# Altium PCB tPad_Yeongmi.PcbDoc (part 2 of 2)
Units mm, origin at the board's own origin, x right, y up, seen from the top; angles counter-clockwise.
Board outline 153.92 x 137.16 mm, 2 copper layers (Top Layer, Bottom Layer); 136 components, 117 nets, 499 pads, 114 vias.
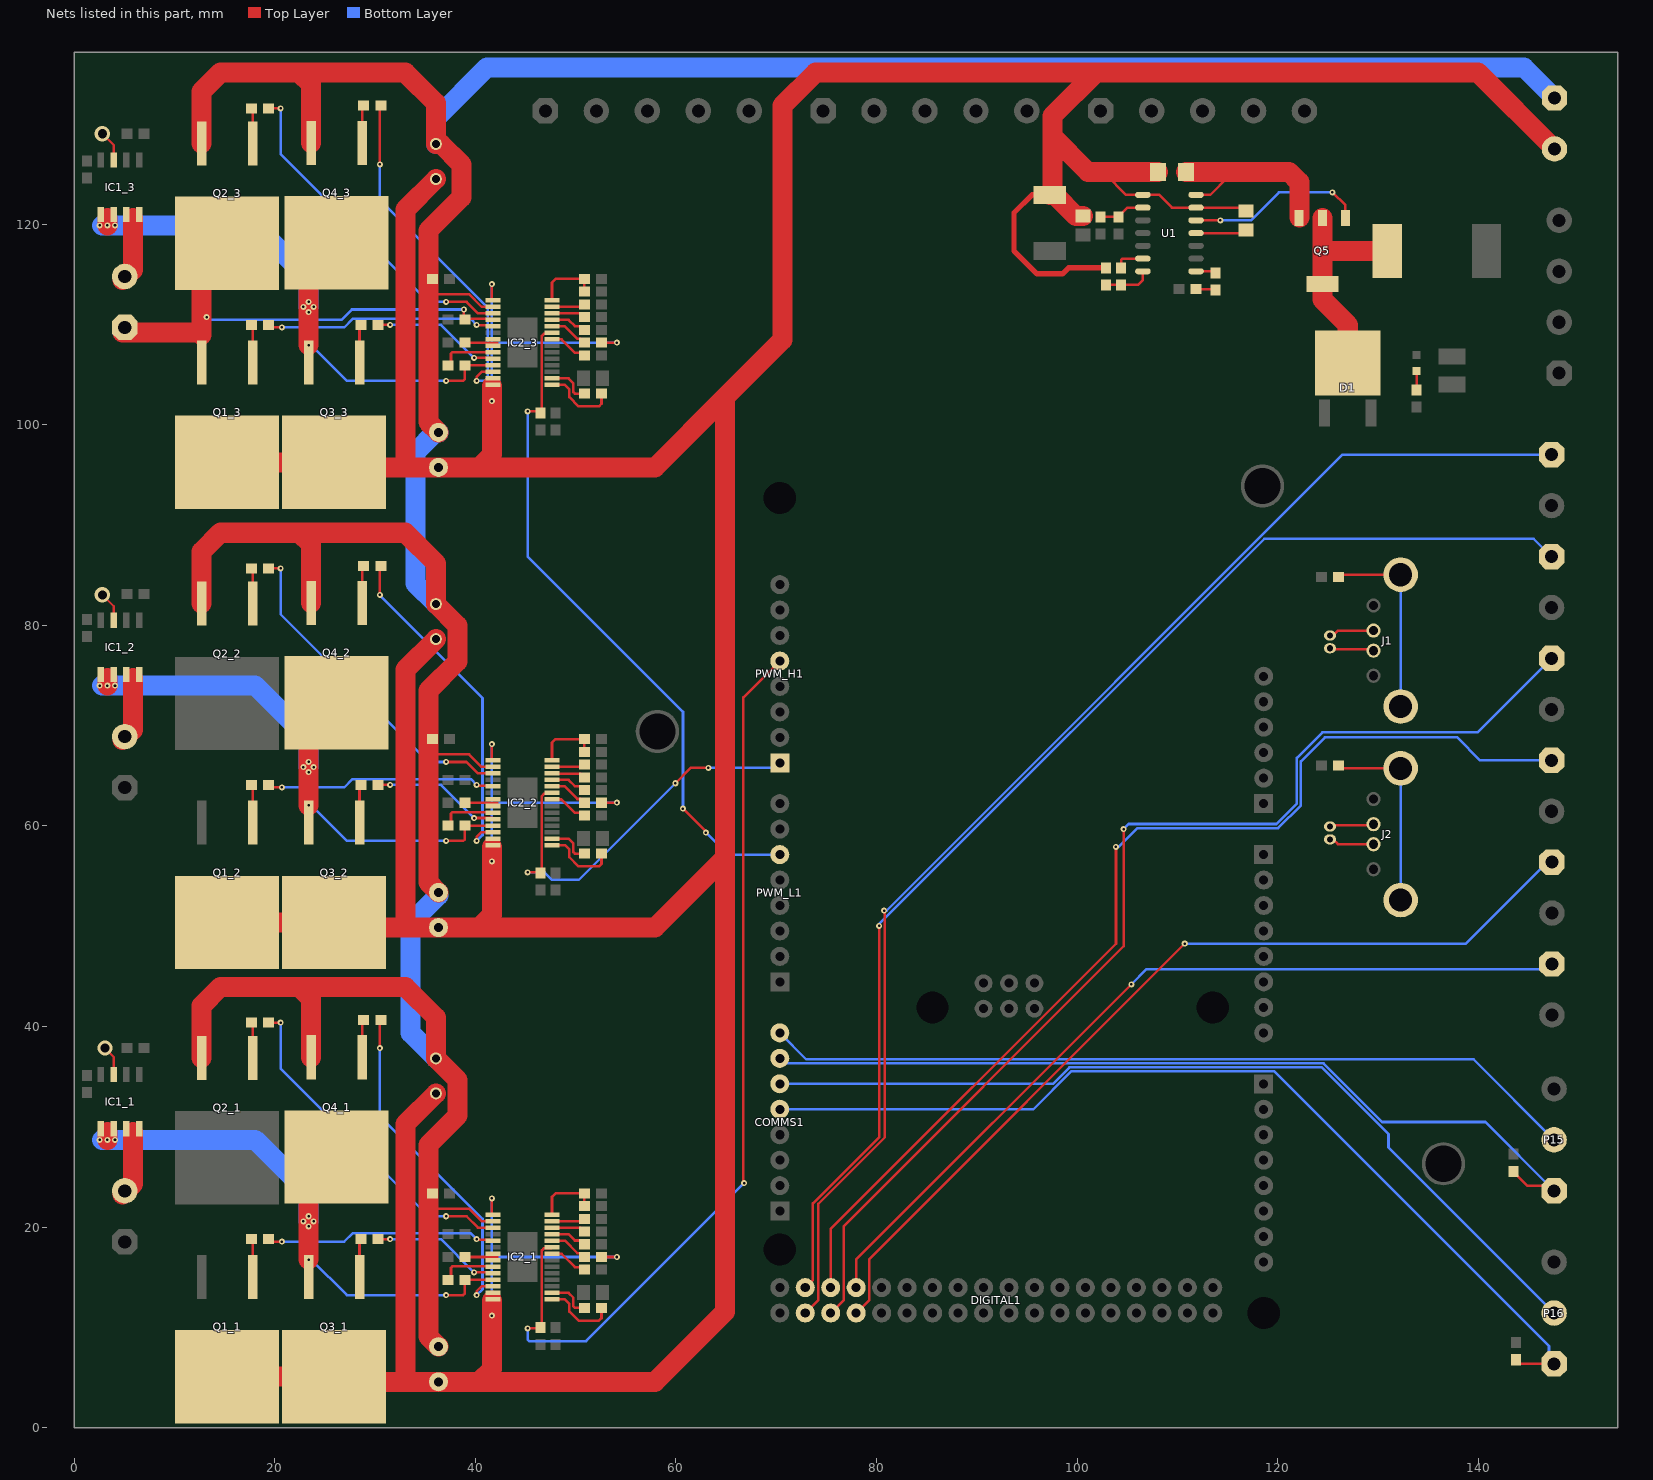
[diagram p2: the nets of this part, all layers, seen from the top]

## Via types
v1: diameter 0.6, hole 0.25, Top Layer to Bottom Layer, tented both sides, 111 vias
v2: diameter 1.5, hole 0.9, Top Layer to Bottom Layer, 3 vias

## Nets (pads, with @x,y where several pads share a name; then routed paths per layer and width w, separated by ;. In a path a pad name is that pad's centre, name@x,y a point inside that pad or via, vN(x,y) a via of type N, cw(c..) or ccw(c..) an arc to the next point about the centre after c; other vN are vias at no path point) (continued)
NetC3_3_2: C3_3.2 IC2_3.4 P1_3.1 Q1_3.3 Q2_3.2 | length 48.3
  Top Layer w0.254: Q2_3.2@12.7,115.57 Q2_3.2@15.24,118.11 ; v1(38.862,111.506) 38.862,110.578 C3_3.2@38.95,110.49 39.021,110.561 41.684,110.561 IC2_3.4@41.766,110.479
  Top Layer w2: P1_3.1@4.826,109.22 12.446,109.22 12.7,108.966 12.7,110.744 Q2_3.2@12.7,115.57
  Bottom Layer w0.254: v1(13.208,110.744) 13.471,110.481 26.661,110.481 27.686,111.506 v1(38.862,111.506)
NetC4_1_1: C4_1.1 IC2_1.7 IC2_1.8 | length 3.2
  Top Layer w0.254: C4_1.1@38.95,17.018 42.164,17.018
NetC4_2_1: C4_2.1 IC2_2.7 IC2_2.8 | length 3.2
  Top Layer w0.254: C4_2.1@38.95,62.318 42.164,62.318
NetC4_3_1: C4_3.1 IC2_3.7 IC2_3.8 | length 3.2
  Top Layer w0.254: C4_3.1@38.95,108.204 42.164,108.204
NetC6_1_1: C6_1.1 IC2_1.9 | length 5.6
  Top Layer w0.254: C6_1.1@37.25,14.732 37.572,15.054 37.572,15.925 37.721,16.073 41.736,16.073 IC2_1.9@41.766,16.043
NetC6_1_2: C6_1.2 IC1_1.1 IC1_1.2 IC2_1.11 Q3_1.3 Q4_1.2 | length 59
  Top Layer w0.254: v1(37.084,13.208) 38.784,13.208 38.95,13.374 C6_1.2@38.95,14.732 38.961,14.743 IC2_1.11@41.766,14.743
  Top Layer w2: v1(3.302,28.702) 3.302,29.464 ; v1(23.368,16.764) 23.368,17.526 v1(23.368,20.066) v1(23.368,21.082) 23.368,24.19 Q4_1.2@26.162,26.984
  Bottom Layer w0.254: v1(23.368,16.764) 23.39,16.786 23.6,16.786 27.178,13.208 v1(37.084,13.208)
  Bottom Layer w2: v1@2.794,28.702 v1(3.302,28.702) v1(4.064,28.702) 18.034,28.702 23.368,23.368 v1(23.368,21.082) 23.368,20.574
  other v1: 22.86,20.574 23.876,20.574 2.54,28.702
NetC6_2_1: C6_2.1 IC2_2.9 | length 5.6
  Top Layer w0.254: C6_2.1@37.25,60.032 37.572,60.354 37.572,61.225 37.721,61.373 41.736,61.373 IC2_2.9@41.766,61.343
NetC6_2_2: C6_2.2 IC1_2.1 IC1_2.2 IC2_2.11 Q3_2.3 Q4_2.2 | length 59
  Top Layer w0.254: v1(37.084,58.508) 38.784,58.508 38.95,58.674 C6_2.2@38.95,60.032 38.961,60.043 IC2_2.11@41.766,60.043
  Top Layer w2: v1(3.302,74.002) 3.302,74.764 ; v1(23.368,62.064) 23.368,62.826 v1(23.368,65.366) v1(23.368,66.382) 23.368,69.49 Q4_2.2@26.162,72.284
  Bottom Layer w0.254: v1(23.368,62.064) 23.39,62.086 23.6,62.086 27.178,58.508 v1(37.084,58.508)
  Bottom Layer w2: v1@2.794,74.002 v1(3.302,74.002) v1(4.064,74.002) 18.034,74.002 23.368,68.668 v1(23.368,66.382) 23.368,65.874
  other v1: 22.86,65.874 23.876,65.874 2.54,74.002
NetC6_3_1: C6_3.1 IC2_3.9 | length 5.6
  Top Layer w0.254: C6_3.1@37.25,105.918 37.572,106.24 37.572,107.111 37.721,107.259 41.736,107.259 IC2_3.9@41.766,107.229
NetC6_3_2: C6_3.2 IC1_3.1 IC1_3.2 IC2_3.11 Q3_3.3 Q4_3.2 | length 59
  Top Layer w0.254: v1(37.084,104.394) 38.784,104.394 38.95,104.56 C6_3.2@38.95,105.918 38.961,105.929 IC2_3.11@41.766,105.929
  Top Layer w2: v1(3.302,119.888) 3.302,120.65 ; v1(23.368,107.95) 23.368,108.712 v1(23.368,111.252) v1(23.368,112.268) 23.368,115.376 Q4_3.2@26.162,118.17
  Bottom Layer w0.254: v1(23.368,107.95) 23.39,107.972 23.6,107.972 27.178,104.394 v1(37.084,104.394)
  Bottom Layer w2: v1@2.794,119.888 v1(3.302,119.888) v1(4.064,119.888) 18.034,119.888 23.368,114.554 v1(23.368,112.268) 23.368,111.76
  other v1: 22.86,111.76 23.876,111.76 2.54,119.888
NetC7_1_1: C7_1.1 IC2_1.16 | length 4.4
  Top Layer w0.254: IC2_1.16@47.642,13.443 49.295,13.443 49.784,12.954 49.784,12.087 49.933,11.938 C7_1.1@50.878,11.938
NetC7_1_2: C7_1.2 IC2_1.15 | length 7.4
  Top Layer w0.254: IC2_1.15@47.642,12.793 48.929,12.793 49.378,12.344 49.378,11.582 50.292,10.668 52.324,10.668 52.578,10.922 C7_1.2@52.578,11.938
NetC7_2_1: C7_2.1 IC2_2.16 | length 4.4
  Top Layer w0.254: IC2_2.16@47.642,58.743 49.295,58.743 49.784,58.254 49.784,57.387 49.933,57.238 C7_2.1@50.878,57.238
NetC7_2_2: C7_2.2 IC2_2.15 | length 7.4
  Top Layer w0.254: IC2_2.15@47.642,58.093 48.929,58.093 49.378,57.644 49.378,56.882 50.292,55.968 52.324,55.968 52.578,56.222 C7_2.2@52.578,57.238
NetC7_3_1: C7_3.1 IC2_3.16 | length 4.4
  Top Layer w0.254: IC2_3.16@47.642,104.629 49.295,104.629 49.784,104.14 49.784,103.273 49.933,103.124 C7_3.1@50.878,103.124
NetC7_3_2: C7_3.2 IC2_3.15 | length 7.4
  Top Layer w0.254: IC2_3.15@47.642,103.979 48.929,103.979 49.378,103.53 49.378,102.768 50.292,101.854 52.324,101.854 52.578,102.108 C7_3.2@52.578,103.124
NetC10_1: C10.1 U1.11 | length 5.1
  Top Layer w0.254: U1.11@111.87,119.126 116.52,119.126 C10.1@116.84,119.446
NetC11_1: C11.1 U1.8 | length 2
  Top Layer w0.254: U1.8@111.87,115.316 113.626,115.316 C11.1@113.792,115.15
NetC11_2: C11.2 R23.1 | length 2
  Top Layer w0.254: R23.1@111.848,113.538 113.704,113.538 C11.2@113.792,113.45
NetD1_3: D1.3 L1.1 Q5.2 Q5.4 | length 22
  Top Layer w2: Q5.2@124.46,120.648 124.46,117.348 ; D1.3@127,106.172 127,109.982 124.46,112.522 Q5.4@124.46,114.048 124.46,117.348 ; L1.1@130.94,117.348 124.46,117.348
NetD2_2: D2.2 R18.2 | length 1.9
  Top Layer w0.254: R18.2@133.858,103.466 D2.2@133.858,105.372
NetIC1_1_3: IC1_1.3 IC1_1.4 P1_1.2 | length 6.6
  Top Layer w2: P1_1.2@4.826,23.26 5.842,24.276 5.842,29.464
NetIC1_1_7: IC1_1.7 | length 3
  Top Layer w0.254: v2(3.048,37.846) 3.937,36.957 IC1_1.7@3.937,35.224
NetIC1_2_3: IC1_2.3 IC1_2.4 P1_2.2 | length 6.6
  Top Layer w2: P1_2.2@4.826,68.56 5.842,69.576 5.842,74.764
NetIC1_2_7: IC1_2.7 | length 3
  Top Layer w0.254: v2(2.794,83.058) 3.937,81.915 IC1_2.7@3.937,80.524
NetIC1_3_3: IC1_3.3 IC1_3.4 P1_3.2 | length 6.6
  Top Layer w2: P1_3.2@4.826,114.446 5.842,115.462 5.842,120.65
NetIC1_3_7: IC1_3.7 | length 3.1
  Top Layer w0.254: v2(2.794,129.032) 3.937,127.889 IC1_3.7@3.937,126.41
NetIC2_1_3: IC2_1.3 R2_1.2 | length 33.5
  Top Layer w0.254: R2_1.2@19.392,40.386 v1(20.574,40.386) ; v1(37.084,21.082) 39.116,21.082 40.255,19.943 IC2_1.3@41.766,19.943
  Bottom Layer w0.254: v1(20.574,40.386) 20.574,35.814 35.306,21.082 v1(37.084,21.082)
NetIC2_1_5: IC2_1.5 R1_1.2 | length 23.1
  Top Layer w0.254: R1_1.2@19.392,18.796 19.646,18.542 v1(20.701,18.542) ; v1(40.132,18.796) 40.198,18.73 41.679,18.73 IC2_1.5@41.766,18.643
  Bottom Layer w0.254: v1(20.701,18.542) 26.924,18.542 27.757,19.375 39.553,19.375 v1(40.132,18.796)
NetIC2_1_10: IC2_1.10 R9_1.2 | length 12.9
  Top Layer w0.254: R9_1.2@30.314,18.796 v1(31.496,18.796) ; v1(39.878,15.494) 41.665,15.494 IC2_1.10@41.766,15.393
  Bottom Layer w0.254: v1(31.496,18.796) 36.576,18.796 v1(39.878,15.494)
NetIC2_1_12: IC2_1.12 R12_1.2 | length 34.2
  Top Layer w0.254: v1(30.48,37.846) 30.48,40.552 R12_1.2@30.568,40.64 ; v1(40.132,13.208) 40.132,13.601 40.624,14.093 IC2_1.12@41.766,14.093
  Bottom Layer w0.254: v1(30.48,37.846) 30.48,31.045 40.711,20.814 40.711,13.787 v1(40.132,13.208)
NetIC2_1_22: IC2_1.22 R11_1.1 | length 3.9
  Top Layer w0.254: IC2_1.22@47.642,17.343 48.592,17.343 49.933,16.002 50.624,16.002 R11_1.1@50.878,15.748
NetIC2_1_24: IC2_1.24 R10_1.1 | length 3.9
  Top Layer w0.254: IC2_1.24@47.642,18.643 48.921,18.643 50.173,17.391 50.505,17.391 R10_1.1@50.878,17.018
NetIC2_1_25: IC2_1.25 R8_1.1 | length 3.7
  Top Layer w0.254: IC2_1.25@47.642,19.293 49.287,19.293 49.919,18.661 50.505,18.661 R8_1.1@50.878,18.288
NetIC2_1_26: IC2_1.26 R7_1.1 | length 3.4
  Top Layer w0.254: IC2_1.26@47.642,19.943 47.654,19.931 50.505,19.931 R7_1.1@50.878,19.558
NetIC2_1_27: IC2_1.27 R5_1.1 | length 3.3
  Top Layer w0.254: IC2_1.27@47.642,20.593 50.643,20.593 R5_1.1@50.878,20.828
NetIC2_1_28: IC2_1.28 R3_1.2 R4_1.1 | length 6.4
  Top Layer w0.254: IC2_1.28@47.642,21.243 47.642,23.004 48.006,23.368 R3_1.2@50.878,23.368 R4_1.1@50.878,22.098
NetIC2_2_3: IC2_2.3 R2_2.2 | length 33.5
  Top Layer w0.254: R2_2.2@19.392,85.686 v1(20.574,85.686) ; v1(37.084,66.382) 39.116,66.382 40.255,65.243 IC2_2.3@41.766,65.243
  Bottom Layer w0.254: v1(20.574,85.686) 20.574,81.114 35.306,66.382 v1(37.084,66.382)
NetIC2_2_5: IC2_2.5 R1_2.2 | length 23.1
  Top Layer w0.254: R1_2.2@19.392,64.096 19.646,63.842 v1(20.701,63.842) ; v1(40.132,64.096) 40.198,64.03 41.679,64.03 IC2_2.5@41.766,63.943
  Bottom Layer w0.254: v1(20.701,63.842) 26.924,63.842 27.757,64.675 39.553,64.675 v1(40.132,64.096)
NetIC2_2_10: IC2_2.10 R9_2.2 | length 12.9
  Top Layer w0.254: R9_2.2@30.314,64.096 v1(31.496,64.096) ; v1(39.878,60.794) 41.665,60.794 IC2_2.10@41.766,60.693
  Bottom Layer w0.254: v1(31.496,64.096) 36.576,64.096 v1(39.878,60.794)
NetIC2_2_12: IC2_2.12 R12_2.2 | length 34.2
  Top Layer w0.254: v1(30.48,83.058) 30.48,85.852 R12_2.2@30.568,85.94 ; v1(40.132,58.508) 40.132,58.901 40.624,59.393 IC2_2.12@41.766,59.393
  Bottom Layer w0.254: v1(30.48,83.058) 30.48,82.974 40.711,72.743 40.711,59.087 v1(40.132,58.508)
NetIC2_2_22: IC2_2.22 R11_2.1 | length 3.9
  Top Layer w0.254: IC2_2.22@47.642,62.643 48.592,62.643 49.933,61.302 50.624,61.302 R11_2.1@50.878,61.048
NetIC2_2_24: IC2_2.24 R10_2.1 | length 3.9
  Top Layer w0.254: IC2_2.24@47.642,63.943 48.921,63.943 50.173,62.691 50.505,62.691 R10_2.1@50.878,62.318
NetIC2_2_25: IC2_2.25 R8_2.1 | length 3.7
  Top Layer w0.254: IC2_2.25@47.642,64.593 49.287,64.593 49.919,63.961 50.505,63.961 R8_2.1@50.878,63.588
NetIC2_2_26: IC2_2.26 R7_2.1 | length 3.4
  Top Layer w0.254: IC2_2.26@47.642,65.243 47.654,65.231 50.505,65.231 R7_2.1@50.878,64.858
NetIC2_2_27: IC2_2.27 R5_2.1 | length 3.3
  Top Layer w0.254: IC2_2.27@47.642,65.893 50.643,65.893 R5_2.1@50.878,66.128
NetIC2_2_28: IC2_2.28 R3_2.2 R4_2.1 | length 6.4
  Top Layer w0.254: IC2_2.28@47.642,66.543 47.642,68.304 48.006,68.668 R3_2.2@50.878,68.668 R4_2.1@50.878,67.398
NetIC2_3_3: IC2_3.3 R2_3.2 | length 33.5
  Top Layer w0.254: R2_3.2@19.392,131.572 v1(20.574,131.572) ; v1(37.084,112.268) 39.116,112.268 40.255,111.129 IC2_3.3@41.766,111.129
  Bottom Layer w0.254: v1(20.574,131.572) 20.574,127 35.306,112.268 v1(37.084,112.268)
NetIC2_3_5: IC2_3.5 R1_3.2 | length 23.1
  Top Layer w0.254: R1_3.2@19.392,109.982 19.646,109.728 v1(20.701,109.728) ; v1(40.132,109.982) 40.198,109.916 41.679,109.916 IC2_3.5@41.766,109.829
  Bottom Layer w0.254: v1(20.701,109.728) 26.924,109.728 27.757,110.561 39.553,110.561 v1(40.132,109.982)
NetIC2_3_10: IC2_3.10 R9_3.2 | length 12.9
  Top Layer w0.254: R9_3.2@30.314,109.982 v1(31.496,109.982) ; v1(39.878,106.68) 41.665,106.68 IC2_3.10@41.766,106.579
  Bottom Layer w0.254: v1(31.496,109.982) 36.576,109.982 v1(39.878,106.68)
NetIC2_3_12: IC2_3.12 R12_3.2 | length 35.1
  Top Layer w0.254: v1(30.48,125.984) 30.48,131.738 R12_3.2@30.568,131.826 ; v1(40.132,104.394) 40.132,104.787 40.624,105.279 IC2_3.12@41.766,105.279
  Bottom Layer w0.254: v1(30.48,125.984) 30.48,122.428 41.25,111.658 41.25,104.75 40.894,104.394 v1(40.132,104.394)
NetIC2_3_22: IC2_3.22 R11_3.1 | length 3.9
  Top Layer w0.254: IC2_3.22@47.642,108.529 48.592,108.529 49.933,107.188 50.624,107.188 R11_3.1@50.878,106.934
NetIC2_3_24: IC2_3.24 R10_3.1 | length 3.9
  Top Layer w0.254: IC2_3.24@47.642,109.829 48.921,109.829 50.173,108.577 50.505,108.577 R10_3.1@50.878,108.204
NetIC2_3_25: IC2_3.25 R8_3.1 | length 3.7
  Top Layer w0.254: IC2_3.25@47.642,110.479 49.287,110.479 49.919,109.847 50.505,109.847 R8_3.1@50.878,109.474
NetIC2_3_26: IC2_3.26 R7_3.1 | length 3.4
  Top Layer w0.254: IC2_3.26@47.642,111.129 47.654,111.117 50.505,111.117 R7_3.1@50.878,110.744
NetIC2_3_27: IC2_3.27 R5_3.1 | length 3.3
  Top Layer w0.254: IC2_3.27@47.642,111.779 50.643,111.779 R5_3.1@50.878,112.014
NetIC2_3_28: IC2_3.28 R3_3.2 R4_3.1 | length 6.4
  Top Layer w0.254: IC2_3.28@47.642,112.429 47.642,114.19 48.006,114.554 R3_3.2@50.878,114.554 R4_3.1@50.878,113.284
NetJ1_2: J1.2 P3.2 | length 4.4
  Top Layer w0.254: P3.2@125.222,77.724 125.341,77.605 129.445,77.605 J1.2@129.564,77.486
NetJ1_3: J1.3 P3.1 | length 4.5
  Top Layer w0.254: P3.1@125.222,78.994 125.524,78.994 126.016,79.486 J1.3@129.564,79.486
NetJ1_Shell: J1.Shell R16.2 | length 19.4
  Top Layer w0.254: R16.2@126.072,84.836 126.292,85.056 J1.Shell@132.274,85.056
  Bottom Layer w0.254: J1.Shell@132.274,71.916 J1.Shell@132.274,85.056
NetJ2_2: J2.2 P4.2 | length 4.5
  Top Layer w0.254: P4.2@125.222,58.674 125.524,58.674 126.016,58.182 J2.2@129.564,58.182
NetJ2_3: J2.3 P4.1 | length 4.4
  Top Layer w0.254: P4.1@125.222,59.944 125.341,60.063 129.445,60.063 J2.3@129.564,60.182
NetJ2_Shell: J2.Shell R17.2 | length 19.5
  Top Layer w0.254: R17.2@126.072,66.04 126.36,65.752 J2.Shell@132.274,65.752
  Bottom Layer w0.254: J2.Shell@132.274,52.612 J2.Shell@132.274,65.752
NetQ1_1_1: Q1_1.1 R1_1.1 | length 3.8
  Top Layer w0.254: R1_1.1@17.692,18.796 17.78,18.708 Q1_1.1@17.78,15.03
NetQ1_2_1: Q1_2.1 R1_2.1 | length 3.8
  Top Layer w0.254: R1_2.1@17.692,64.096 17.78,64.008 Q1_2.1@17.78,60.33
NetQ1_3_1: Q1_3.1 R1_3.1 | length 3.8
  Top Layer w0.254: R1_3.1@17.692,109.982 17.78,109.894 Q1_3.1@17.78,106.216
NetQ2_1_1: Q2_1.1 R2_1.1 | length 3.5
  Top Layer w0.254: R2_1.1@17.692,40.386 17.78,40.298 Q2_1.1@17.78,36.874
NetQ2_2_1: Q2_2.1 R2_2.1 | length 3.5
  Top Layer w0.254: R2_2.1@17.692,85.686 17.78,85.598 Q2_2.1@17.78,82.174
NetQ2_3_1: Q2_3.1 R2_3.1 | length 3.5
  Top Layer w0.254: R2_3.1@17.692,131.572 17.78,131.484 Q2_3.1@17.78,128.06
NetQ3_1_1: Q3_1.1 R9_1.1 | length 3.8
  Top Layer w0.254: Q3_1.1@28.448,15.03 28.448,18.63 R9_1.1@28.614,18.796
NetQ3_2_1: Q3_2.1 R9_2.1 | length 3.8
  Top Layer w0.254: Q3_2.1@28.448,60.33 28.448,63.93 R9_2.1@28.614,64.096
NetQ3_3_1: Q3_3.1 R9_3.1 | length 3.8
  Top Layer w0.254: Q3_3.1@28.448,106.216 28.448,109.816 R9_3.1@28.614,109.982
NetQ4_1_1: Q4_1.1 R12_1.1 | length 3.8
  Top Layer w0.254: Q4_1.1@28.702,36.934 28.702,40.474 R12_1.1@28.868,40.64
NetQ4_2_1: Q4_2.1 R12_2.1 | length 3.8
  Top Layer w0.254: Q4_2.1@28.702,82.234 28.702,85.774 R12_2.1@28.868,85.94
NetQ4_3_1: Q4_3.1 R12_3.1 | length 3.8
  Top Layer w0.254: Q4_3.1@28.702,128.12 28.702,131.66 R12_3.1@28.868,131.826
NetQ5_1: Q5.1 U1.12 | length 17.8
  Top Layer w0.254: U1.12@111.87,120.396 v1(114.3,120.396) ; v1(125.476,123.19) 126.76,121.906 Q5.1@126.76,120.648
  Bottom Layer w0.254: v1(114.3,120.396) 117.348,120.396 120.142,123.19 v1(125.476,123.19)
NetQ5_3: Q5.3 R15.2 U1.14 | length 19.5
  Top Layer w0.254: U1.14@111.87,122.936 113.284,122.936 115.062,124.714 115.062,124.968 ; Q5.3@122.16,120.648 Q5.3@122.174,120.662
  Top Layer w2: R15.2@110.874,125.222 115.062,125.222 121.158,125.222 122.174,124.206 Q5.3@122.174,120.662
NetR19_1: R19.1 R22.2 U1.2 | length 4.6
  Top Layer w0.254: R22.2@102.362,120.738 R19.1@104.14,120.738 104.14,120.788 105.018,121.666 U1.2@106.57,121.666
NetR20_2: R20.2 R21.1 U1.7 | length 4.8
  Top Layer w0.254: R20.2@102.87,113.958 R21.1@104.394,113.958 106.084,113.958 106.575,114.449 106.575,115.311 U1.7@106.57,115.316
NetR21_2: R21.2 U1.6 | length 3
  Top Layer w0.254: R21.2@104.394,115.658 104.394,116.437 104.543,116.586 U1.6@106.57,116.586
PGND_1: C1_1.2 C1_2.2 C1_3.2 C13_1.2 C13_2.2 C13_3.2 IC2_1.2 IC2_2.2 IC2_3.2 P5.1 Q2_1.3 Q2_2.3 Q2_3.3 Q4_1.3 Q4_2.3 Q4_3.3 R14_1.1 R14_2.1 R14_3.1 | length 397.5
  Top Layer w0.254: 35.306,22.098 35.56,21.844 39.37,21.844 40.621,20.593 IC2_1.2@41.766,20.593 ; 35.306,67.398 35.56,67.144 39.37,67.144 40.621,65.893 IC2_2.2@41.766,65.893 ; 35.306,113.284 35.56,113.03 39.37,113.03 40.621,111.779 IC2_3.2@41.766,111.779
  Top Layer w2: Q2_1.3@12.7,36.874 12.7,42.074 14.568,43.942 22.45,43.942 ; Q2_2.3@12.7,82.174 12.7,87.374 14.568,89.242 22.45,89.242 ; Q2_3.3@12.7,128.06 12.7,133.26 14.568,135.128 22.45,135.128 ; Q4_1.3@23.622,36.934 23.622,42.77 22.45,43.942 ; Q4_2.3@23.622,82.234 23.622,88.07 22.45,89.242 ; Q4_3.3@23.622,128.12 23.622,133.956 22.45,135.128 ; C1_1.2@36.322,8.072 35.306,9.088 35.306,22.098 35.306,28.194 38.22,31.108 38.22,34.678 C13_1.2@36.068,36.83 36.068,40.894 33.02,43.942 22.45,43.942 ; C1_2.2@36.322,53.372 35.306,54.388 35.306,67.398 35.306,73.494 38.22,76.408 38.22,79.978 C13_2.2@36.068,82.13 36.068,86.194 33.02,89.242 22.45,89.242 ; C1_3.2@36.322,99.258 35.306,100.274 35.306,113.284 35.306,119.38 38.608,122.682 38.608,125.984 36.576,128.016 C13_3.2@36.068,128.016 36.068,132.08 33.02,135.128 22.45,135.128
  Bottom Layer w0.254: C1_2.2@36.322,53.086 C1_2.2@36.322,53.372
  Bottom Layer w2: C13_1.2@36.068,36.83 33.528,39.37 33.528,50.292 C1_2.2@36.322,53.086 ; C13_2.2@36.068,82.13 34.036,84.162 34.036,97.282 36.012,99.258 C1_3.2@36.322,99.258 ; C13_3.2@36.068,128.016 36.068,130.556 41.148,135.636 144.578,135.636 P5.1@147.616,132.597
PWM1: IC2_1.23 PWM_H1.5 R6_1.2 | length 93.1
  Top Layer w0.254: v1(45.212,9.906) 46.394,9.906 R6_1.2@46.482,9.994 46.625,10.137 46.625,17.684 46.836,17.895 47.544,17.895 IC2_1.23@47.642,17.993 ; v1(66.802,24.384) 66.802,24.478 66.731,24.549 66.731,72.827 PWM_H1.5@70.358,76.454
  Bottom Layer w0.254: v1(45.212,9.906) 45.212,8.785 45.361,8.636 51.054,8.636 v1(66.802,24.384)
PWM2: IC2_2.23 PWM_H1.1 R6_2.2 | length 40.5
  Top Layer w0.254: v1(45.212,55.372) 46.404,55.372 R6_2.2@46.482,55.294 46.625,55.437 46.625,62.984 46.836,63.195 47.544,63.195 IC2_2.23@47.642,63.293 ; v1(59.944,64.262) 61.468,65.786 v1(63.246,65.786)
  Bottom Layer w0.254: v1(45.212,55.372) 46.911,55.372 47.657,54.627 50.309,54.627 v1(59.944,64.262) ; v1(63.246,65.786) 69.85,65.786 PWM_H1.1@70.358,66.294
PWM3: IC2_3.23 PWM_L1.6 R6_3.2 | length 67.9
  Top Layer w0.254: v1(45.212,101.346) 46.316,101.346 R6_3.2@46.482,101.18 46.625,101.323 46.625,108.87 46.836,109.081 47.544,109.081 IC2_3.23@47.642,109.179 ; v1(60.706,61.722) 62.992,59.436 v1(62.992,59.341)
  Bottom Layer w0.254: v1(45.212,101.346) 45.212,86.868 60.706,71.374 v1(60.706,61.722) ; v1(62.992,59.341) 65.183,57.15 PWM_L1.6@70.358,57.15
RX2: COMMS1.5 P16.1 R24.1 | length 95.6
  Top Layer w0.254: R24.1@143.764,6.77 143.764,6.723 144.137,6.35 P16.1@147.574,6.35
  Bottom Layer w0.254: COMMS1.5@70.358,31.75 95.64,31.75 99.41,35.519 119.684,35.519 147.066,8.137 147.066,6.858 P16.1@147.574,6.35
RX3: COMMS1.7 P15.1 R25.1 | length 87.6
  Top Layer w0.254: R25.1@143.51,25.566 143.51,25.516 144.896,24.13 147.066,24.13 P15.1@147.574,23.622
  Bottom Layer w0.254: COMMS1.7@70.358,36.83 70.856,36.332 124.583,36.332 130.435,30.48 140.716,30.48 P15.1@147.574,23.622
SW1_H: DIGITAL1.8 P14.1 | length 84.4
  Top Layer w0.254: DIGITAL1.8@77.978,13.97 77.978,16.764 v1(105.41,44.196)
  Bottom Layer w0.254: v1(105.41,44.196) 106.934,45.72 146.845,45.72 P14.1@147.362,46.237
SW1_L: DIGITAL1.7 P13.1 | length 90.4
  Top Layer w0.254: DIGITAL1.7@77.978,11.43 79.289,12.741 79.289,16.805 v1(110.744,48.26)
  Bottom Layer w0.254: v1(110.744,48.26) 138.77,48.26 146.907,56.397 P13.1@147.362,56.397
SW2_H: DIGITAL1.6 P12.1 | length 107.2
  Top Layer w0.254: DIGITAL1.6@75.438,13.97 75.438,19.811 103.886,48.259 v1(103.886,57.912)
  Bottom Layer w0.254: v1(103.886,57.912) 104.14,57.912 106.02,59.792 120.056,59.792 122.326,62.062 122.326,66.446 124.714,68.834 137.922,68.834 140.208,66.548 P12.1@147.32,66.548
SW2_L: DIGITAL1.5 P11.1 | length 112.8
  Top Layer w0.254: DIGITAL1.5@75.438,11.43 76.749,12.741 76.749,20.107 104.648,48.006 v1(104.648,59.69)
  Bottom Layer w0.254: v1(104.648,59.69) 105.156,60.198 119.888,60.198 121.92,62.23 121.92,66.802 124.46,69.342 139.954,69.342 P11.1@147.32,76.708
SW3_H: DIGITAL1.4 P10.1 | length 123
  Top Layer w0.254: DIGITAL1.4@72.898,13.97 73.66,14.732 73.66,22.352 80.264,28.956 v1(80.264,50.038)
  Bottom Layer w0.254: v1(80.264,50.038) 80.264,50.225 118.685,88.646 145.542,88.646 P10.1@147.32,86.868
SW3_L: DIGITAL1.3 P9.1 | length 128.8
  Top Layer w0.254: DIGITAL1.3@72.898,11.43 74.209,12.741 74.209,22.326 80.843,28.961 80.843,51.397 80.772,51.468 v1(80.772,51.562)
  Bottom Layer w0.254: v1(80.772,51.562) 81.026,51.562 126.492,97.028 P9.1@147.32,97.028
TX2: COMMS1.6 P16.2 | length 88.8
  Bottom Layer w0.254: COMMS1.6@70.358,34.29 97.606,34.29 99.241,35.926 124.415,35.926 131.064,29.277 131.064,27.94 P16.2@147.574,11.43
TX3: COMMS1.8 P15.2 | length 81.6
  Bottom Layer w0.254: COMMS1.8@70.358,39.37 72.989,36.739 139.537,36.739 P15.2@147.574,28.702
V+_1: C1_1.1 C1_2.1 C1_3.1 C8.1 C10.2 C12.2 C13_1.1 C13_2.1 C13_3.1 IC2_1.1 IC2_1.13 IC2_1.14 IC2_2.1 IC2_2.13 IC2_2.14 IC2_3.1 IC2_3.13 IC2_3.14 P5.2 Q1_1.2 Q1_2.2 Q1_3.2 Q3_1.2 Q3_2.2 Q3_3.2 R10_1.2 R10_2.2 R10_3.2 R15.1 R20.1 U1.1 U1.13 | length 625.4
  Top Layer w0.254: v1(41.656,22.86) 41.656,21.341 41.754,21.243 IC2_1.1@41.766,21.243 ; v1(41.656,68.16) 41.656,66.641 41.754,66.543 IC2_2.1@41.766,66.543 ; v1(41.656,114.046) 41.656,112.527 41.754,112.429 IC2_3.1@41.766,112.429 ; R10_1.2@52.578,17.018 v1(54.102,17.018) ; R10_2.2@52.578,62.318 v1(54.102,62.318) ; R10_3.2@52.578,108.204 v1(54.102,108.204) ; 102.838,125.222 102.838,125 104.902,122.936 U1.1@106.57,122.936 108.204,122.936 109.474,121.666 U1.13@111.87,121.666 116.52,121.666 C10.2@116.84,121.346
  Top Layer w0.524: C8.1@97.536,123.16 97.318,122.942 C8.1@97.282,122.942 95.51,122.942 93.726,121.158 93.726,117.348 96.012,115.062 98.552,115.062 99.148,115.658 R20.1@102.87,115.658
  Top Layer w2: Q1_1.2@15.24,5.08 23.44,5.08 23.948,4.572 24.456,5.08 Q3_1.2@25.908,5.08 ; Q1_2.2@15.24,50.38 23.44,50.38 23.948,49.872 24.456,50.38 Q3_2.2@25.908,50.38 ; Q1_3.2@15.24,96.266 23.44,96.266 23.948,95.758 24.456,96.266 Q3_3.2@25.908,96.266 ; Q3_1.2@25.908,4.572 33.02,4.572 ; Q3_2.2@25.908,49.872 33.02,49.872 ; Q3_3.2@25.908,95.758 33.02,95.758 ; C13_1.1@36.068,33.33 33.02,30.282 33.02,4.572 ; C13_2.1@36.068,78.63 33.02,75.582 33.02,49.872 ; C13_3.1@36.068,124.516 33.02,121.468 33.02,95.758 ; IC2_1.14@41.656,12.7 v1(41.656,11.176) 41.656,5.842 40.386,4.572 ; IC2_2.14@41.656,57.912 v1(41.656,56.476) 41.656,51.142 40.386,49.872 ; IC2_3.14@41.656,103.886 v1(41.656,102.362) 41.656,97.028 40.386,95.758 ; C8.1@97.318,122.942 97.782,122.942 99.886,120.838 C12.2@100.584,120.838 ; C8.1@97.536,123.16 97.536,128.778 ; R15.1@108.074,125.222 102.838,125.222 101.092,125.222 97.536,128.778 ; P5.2@147.616,127.517 140.006,135.128 101.854,135.128 ; 33.02,4.572 C1_1.1@36.322,4.572 40.386,4.572 ; 33.02,49.872 C1_2.1@36.322,49.872 40.386,49.872 ; 33.02,95.758 C1_3.1@36.322,95.758 40.386,95.758 ; 40.386,4.572 57.912,4.572 64.897,11.557 64.897,56.857 ; 40.386,49.872 57.912,49.872 64.897,56.857 ; 40.386,95.758 57.912,95.758 64.897,102.743 ; 64.897,56.857 64.897,102.743 ; 64.897,102.743 70.612,108.458 70.612,131.826 73.914,135.128 101.854,135.128 ; 97.536,128.778 97.536,130.81 101.854,135.128
  Bottom Layer w0.254: v1(41.656,11.176) 41.656,17.018 ; v1(41.656,22.86) 41.656,17.018 ; v1(41.656,56.476) 41.656,62.318 ; v1(41.656,68.16) 41.656,62.318 ; v1(41.656,102.362) 41.656,108.204 ; v1(41.656,114.046) 41.656,108.204 ; v1(54.102,17.018) 41.656,17.018 ; v1(54.102,62.318) 41.656,62.318 ; v1(54.102,108.204) 41.656,108.204
pads on no net: AD_H1.1 AD_H1.2 AD_H1.3 AD_H1.4 AD_H1.5 AD_H1.6 AD_H1.7 AD_H1.8 AD_L1.1 AD_L1.2 AD_L1.3 AD_L1.4 AD_L1.5 AD_L1.6 AD_L1.7 AD_L1.8 DIGITAL1.9 DIGITAL1.10 DIGITAL1.11 DIGITAL1.12 DIGITAL1.13 DIGITAL1.14 DIGITAL1.15 DIGITAL1.16 DIGITAL1.17 DIGITAL1.18 DIGITAL1.19 DIGITAL1.20 DIGITAL1.21 DIGITAL1.22 DIGITAL1.23 DIGITAL1.24 DIGITAL1.25 DIGITAL1.26 DIGITAL1.27 DIGITAL1.28 DIGITAL1.29 DIGITAL1.30 DIGITAL1.31 DIGITAL1.32 DIGITAL1.33 DIGITAL1.34 ICSP1.1 ICSP1.3 ICSP1.4 ICSP1.5 P6.4 P7.4 P8.4 POWER1.1 POWER1.5 POWER1.6 PWM_H1.4 PWM_H1.6 PWM_H1.8 PWM_L1.1 PWM_L1.2 PWM_L1.5 PWM_L1.8 U1.5 U1.9 U1.10

## Polygon pours and split planes (outlines as drawn)
GND on Bottom Layer "Bottom Layer-GND" (solid, remove dead copper, pour order 8): 0,137.16 153.924,137.16 153.924,0 0,0
no net on Bottom Layer "Bottom Layer-No Net" (solid, pour order 0): 0,137.16
no net on Multi-Layer (solid): 0,137.16
GND on Top Layer "Top Layer-GND" (solid, remove dead copper, pour order 6): 0,137.16 153.924,137.16 153.924,0 0,0

## Keep-outs
Keep-Out Layer:
  the board outline again, w0.254

## Silkscreen, mask and mechanical layers (free items; w line width, h text height)
Top Overlay:
  drawing of 18 lines, arcs and shapes, not listed
  text "www.mci.edu" at 45.063,74.87 h1.8
Bottom Overlay:
  drawing of 42 lines, arcs and shapes, not listed
  text "PGND" at 141.478,132.08 h1.2
  text "10V" at 141.478,127.254 h1.2
  text "5V" at 51.562,123.952 h1.2 r270
  text "5V" at 78.994,123.952 h1.2 r270
  text "5V" at 106.934,123.952 h1.2 r270
  text "GND" at 94.488,122.682 h1.2 r270
  text "GND" at 122.428,122.682 h1.2 r270
  text "GND" at 66.802,122.428 h1.2 r270
  text "EN1_CHB" at 46.228,118.11 h1.2 r270
  text "EN1_CHA" at 56.642,118.11 h1.2 r270
  text "EN2_CHB" at 74.168,117.856 h1.2 r270
  text "EN2_CHA" at 84.328,117.856 h1.2 r270
  text "EN3_CHB" at 101.6,117.856 h1.2 r270
  text "EN3_CHA" at 112.268,117.856 h1.2 r270
  text "GND" at 142.748,116.586 h1.2 r270
  text "M3_OUTB" at 18.796,114.554 h1.2
  text "M3_OUTA" at 18.796,109.22 h1.2
  text "5V" at 142.748,106.68 h1.2 r270
  text "SW_3L" at 140.97,96.52 h1.2
  text "GND" at 140.97,91.44 h1.2
  text "SW_3H" at 141.224,86.614 h1.2
  text "AREF" at 72.39,84.074 h0.51 r225
  text "www.mci.edu" at 112.385,82.229 h2.92
  text "GND" at 72.39,81.534 h0.51 r225
  text "GND" at 141.224,81.534 h1.2
  text "PWM13" at 72.39,78.994 h0.51 r225
  text "PWM12" at 72.39,76.454 h0.51 r225
  text "SW_2L" at 141.478,75.946 h1.2
  text "RESET" at 116.713,74.93 h0.51 r45
  text "PWM11" at 72.39,73.914 h0.51 r225
  text "3v3" at 116.713,72.39 h0.51 r45
  text "PWM10" at 72.39,71.374 h0.51 r225
  text "GND" at 141.478,71.374 h1.2
  text "5v" at 116.713,69.85 h0.51 r45
  text "PWM9" at 72.39,68.834 h0.51 r225
  text "M2_OUTB" at 18.796,68.58 h1.2
  text "GND" at 116.713,67.31 h0.51 r45
  text "PWM8" at 72.39,66.294 h0.51 r225
  text "SW_2H" at 141.478,66.294 h1.2
  text "GND" at 116.713,64.77 h0.51 r45
  text "M2_OUTA" at 18.796,62.738 h1.2
  text "PWM7" at 72.443,62.23 h0.51 r225
  text "Vin" at 116.713,62.23 h0.51 r45
  text "GND" at 141.478,60.96 h1.2
  text "PWM6" at 72.443,59.69 h0.51 r225
  text "PWM5" at 72.443,57.15 h0.51 r225
  text "AD0" at 116.713,57.15 h0.51 r45
  text "SW_1L" at 141.478,55.88 h1.2
  text "PWM4" at 72.443,54.61 h0.51 r225
  text "AD1" at 116.713,54.61 h0.51 r45
  text "PWM3" at 72.443,52.07 h0.51 r225
  text "AD2" at 116.713,52.07 h0.51 r45
  text "GND" at 141.478,51.054 h1.2
  text "PWM2" at 72.263,49.53 h0.51 r225
  text "AD3" at 116.713,49.53 h0.51 r45
  text "TX0" at 72.263,46.99 h0.51 r225
  text "AD4" at 116.713,46.99 h0.51 r45
  text "SW_1H" at 141.478,45.974 h1.2
  text "RX0" at 72.263,44.45 h0.51 r225
  text "AD5" at 116.713,44.45 h0.51 r45
  text "AD6" at 116.713,41.91 h0.51 r45
  text "GND" at 141.478,40.894 h1.2
  text "TX3" at 72.263,39.37 h0.51 r225
  text "AD7" at 116.713,39.37 h0.51 r45
  text "RX3" at 72.263,36.83 h0.51 r225
  text "TX2" at 72.263,34.29 h0.51 r225
  text "AD8" at 116.713,34.29 h0.51 r45
  text "GND" at 143.51,33.274 h1.2
  text "RX2" at 72.263,31.75 h0.51 r225
  text "AD9" at 116.713,31.75 h0.51 r45
  text "TX1" at 72.263,29.21 h0.51 r225
  text "AD10" at 116.713,29.21 h0.51 r45
  text "TX3" at 143.764,28.702 h1.2
  text "RX1" at 72.263,26.67 h0.51 r225
  text "AD11" at 116.713,26.67 h0.51 r45
  text "SDA" at 72.263,24.13 h0.51 r225
  text "AD12" at 116.713,24.13 h0.51 r45
  text "M1_OUTB" at 18.288,23.114 h1.2
  text "RX3" at 143.51,23.114 h1.2
  text "SCL" at 72.263,21.59 h0.51 r225
  text "AD13" at 116.713,21.59 h0.51 r45
  text "AD14" at 116.713,19.05 h0.51 r45
  text "M1_OUTA" at 18.288,17.526 h1.2
  text "5V" at 70.358,17.145 h0.51 r135
  text "22" at 72.898,17.145 h0.51 r135
  text "24" at 75.438,17.145 h0.51 r135
  text "26" at 77.978,17.145 h0.51 r135
  text "28" at 80.518,17.145 h0.51 r135
  text "30" at 83.058,17.145 h0.51 r135
  text "32" at 85.598,17.145 h0.51 r135
  text "34" at 88.138,17.145 h0.51 r135
  text "36" at 90.678,17.145 h0.51 r135
  text "38" at 93.218,17.145 h0.51 r135
  text "40" at 95.758,17.145 h0.51 r135
  text "42" at 98.298,17.145 h0.51 r135
  text "44" at 100.838,17.145 h0.51 r135
  text "46" at 103.378,17.145 h0.51 r135
  text "48" at 105.918,17.145 h0.51 r135
  text "50" at 108.458,17.145 h0.51 r135
  text "52" at 110.998,17.145 h0.51 r135
  text "GND" at 113.538,17.145 h0.51 r135
  text "AD15" at 116.713,16.51 h0.51 r45
  text "GND" at 144.018,16.002 h1.2
  text "TX2" at 143.764,10.922 h1.2
  text "5V" at 70.993,9.525 h0.51 r45
  text "23" at 73.533,9.525 h0.51 r45
  text "25" at 76.073,9.525 h0.51 r45
  text "27" at 78.613,9.525 h0.51 r45
  text "29" at 81.153,9.525 h0.51 r45
  text "31" at 83.693,9.525 h0.51 r45
  text "33" at 86.233,9.525 h0.51 r45
  text "35" at 88.773,9.525 h0.51 r45
  text "37" at 91.313,9.525 h0.51 r45
  text "39" at 93.853,9.525 h0.51 r45
  text "41" at 96.393,9.525 h0.51 r45
  text "43" at 98.933,9.525 h0.51 r45
  text "45" at 101.473,9.525 h0.51 r45
  text "47" at 104.013,9.525 h0.51 r45
  text "49" at 106.553,9.525 h0.51 r45
  text "51" at 109.093,9.525 h0.51 r45
  text "53" at 111.633,9.525 h0.51 r45
  text "GND" at 114.173,9.525 h0.51 r45
  text "RX2" at 143.764,5.842 h1.2
Mechanical 1:
  circle w0.127: c70.358,92.71 r1.6
  circle w0.127: c113.538,41.91 r1.6
  circle w0.127: c118.618,93.98 r1.6
  circle w0.127: c85.598,41.91 r1.6
  circle w0.127: c70.358,17.78 r1.6
  circle w0.127: c118.618,11.43 r1.6
  lines w0.127: 77.216,107.95 77.216,114.3 88.646,114.3 88.646,107.95 ; 108.712,107.95 108.712,109.982 118.11,109.982 118.11,107.95 ; 67.818,11.43 70.358,8.89 80.518,8.89 83.058,6.35 117.348,6.35 119.888,8.89 121.158,8.89 121.158,107.95 67.818,107.95 67.818,11.43